# EAGLE board bat-phone Dodo (EAGLE 8.6.3)
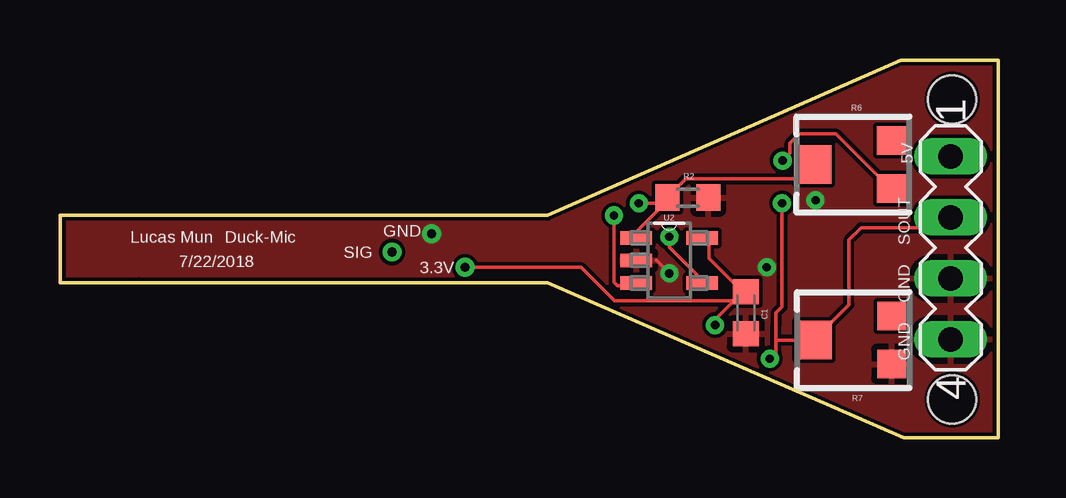
[diagram p0: board, top side]
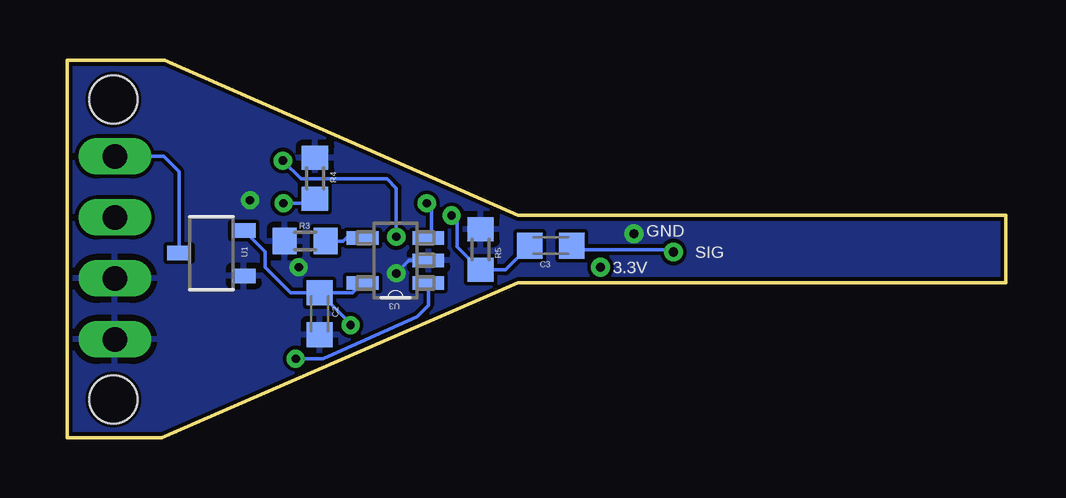
[diagram p1: board, bottom side, seen from below]

Size 39.12 x 15.75 mm. Coordinates in mm from the lower left corner, seen from the top.
Outline: 0,9.27 0,6.48 3.3,6.48 20.32,6.48 35.18,0 39.12,0 39.12,15.75 35.05,15.75 20.32,9.27 0,9.27
Copper layers (1*16): Top 0.035mm / dielectric 0.5mm / Bottom 0.035mm
Design rules "default *": minimum track width 6mil, minimum drill 0.35mm, track to track 6mil, track to pad 6mil, pad to pad 6mil, via to via 6mil, smd to smd 6mil, copper to edge 6mil, drill to drill 6mil, minimum pad ring 10mil, minimum via ring 8mil, stop-mask expansion 4mil, vias tented up to drill 0mil, thermal gap 10mil
Holes 2 mm at 37.2,1.6 37.2,14.1

## Footprints (pad centres in the part's own frame; a part is rotated, then mirrored left to right if it is on the bottom)
C0603K = smd 1.05 x 1.08: 1 -0.875,0; 2 0.875,0
R0603 = smd 1 x 1.1: 1 -0.85,0; 2 0.85,0
35WR = smd 1.2 x 1.2: 1 -1,-1.6; 3 1,-1.6 | smd 1.6 x 1.5: 2 0,1.65
MA04-1 = drill 1.016 long: 1 -3.81,0; 2 -1.27,0; 3 1.27,0; 4 3.81,0
SOT23A_MICROCHIP_CB = smd 0.6 x 1: 1 -0.95,-1.35; 2 0.95,-1.35; 3 0,1.35
SOT95P320X145-5N = smd 1.321 x 0.559: 1 -1.372,0.94; 2 -1.372,0; 3 -1.372,-0.94; 4 1.372,-0.94; 5 1.372,0.94

## Placement (x,y rotation side)
C1  [C0603K]  28.59,5.21 270 top
C2  [C0603K]  28.59,5.17 270 bottom
C3  638pF  [C0603K]  18.96,8.02 180 bottom
R2  [R0603]  26.17,10.02 180 top
R3  [R0603]  29.2,8.21 180 bottom
R4  [R0603]  28.79,10.82 270 bottom
R5  50K  [R0603]  21.89,7.85 270 bottom
R6  TC33X-2-103E  [35WR]  33.06,11.39 90 top
R7  TC33X-2-103E  [35WR]  33.07,4.08 90 top
SV1  [MA04-1]  37.13,7.92 270 top
U1  MCP1703-3302E/CB  [SOT23A_MICROCHIP_CB]  33.11,7.7 90 bottom
U2  MCP6291T-E/OT  [SOT95P320X145-5N]  25.39,7.4 0 top
U3  MCP6291T-E/OT  [SOT95P320X145-5N]  25.43,7.4 180 bottom

## Library data of the parts
C1-C3 R2-R5 = resistor
R6 R7 = TC33X-2-103E; AVAILABILITY: Unavailable; DESCRIPTION: Res Trimmer 10K Ohm 25% 0.1W_1/10W_ 1_Elec_/1_Mech_Turn _3 X 3.8mm_ Foot Print SMD Embossed T/R; MF: Bourns; MP: TC33X-2-103E; PACKAGE: FakePackage u; PRICE: None
SV1 = con-lstb; OC_FARNELL: unknown; OC_NEWARK: unknown
U1 = MCP1703
U2 U3 = MCP6291T-E_OT; AVAILABILITY: Good; DESCRIPTION: MCP6291 Series 6 V 10 MHz Rail-to-Rail I/O Operational Amplifier - SOT-23-5; MF: Microchip; MP: MCP6291T-E/OT; PACKAGE: SOT-23 Microchip; PRICE: 0.58 USD

## Nets
3.3V: C1.1 C2.1 U1.2 U2.5 U3.5
GND: C1.2 C2.2 R2.1 R3.2 R4.1 R5.1 R7.1 SV1.3 SV1.4 U1.1 U2.2 U3.2
N$1: R6.1 U2.4
N$2: R2.2 R6.2 U2.1 U3.3
N$3: R3.1 U3.4
N$4: C3.2 R5.2 U2.3
SIG: C3.1
SOUT: R4.2 R7.2 SV1.2 U3.1
VIN: SV1.1 U1.3

## Tracks (layer width: path | path; a pad name or v marks a point on that pad's centre or on a via)
3.3V  (via drill 0.35, 0.38)
  Top 0.152: U2.5 27.05,8.05 27.05,7.49 28.07,6.48 28.2,6.48 C1.1 28.59,6.21 | 28.59,6.21 27.3,4.93 v27.3,4.7 | v16.89,7.11 21.72,7.11 23.11,5.71 28.09,5.71 28.59,6.21
  Bottom 0.152: U1.2 30.86,7.75 30.86,7.11 29.8,6.05 C2.1 | C2.1 27.21,6.05 U3.5 | C2.1 27.3,4.76 v27.3,4.7
GND  (via drill 0.35, 0.38)
  Top 0.152: 24.86,7.4 v25.4,6.86
  Bottom 0.152: v25.4,6.86 24.86,7.4 U3.2
  other vias: 15.49,8.51 29.46,7.11 31.5,9.91
  pour Top: 40.51,16.26 40.51,-0.63 -1.14,-0.63 -1.14,16.26
  pour Bottom: -2.54,17.02 -2.54,-2.03 41.91,-2.03 41.91,17.02
N$1  (via drill 0.35)
  Top 0.152: v30.13,11.56 30.43,11.86 30.43,12.29 30.82,12.67 32.34,12.67 34.63,10.39 R6.1 | U2.4 26.77,6.59 25.4,7.95 v25.4,8.38
  Bottom 0.152: v25.4,8.38 25.4,10.41 25.78,10.79 29.37,10.79 v30.13,11.56
N$2  (via drill 0.35)
  Top 0.152: U2.1 24.02,8.59 25.32,9.89 R2.2 | R2.2 26.1,10.79 30.81,10.79 R6.2 | v24.13,9.78 25.09,9.78 R2.2
  Bottom 0.152: U3.3 23.93,8.47 23.93,9.58 v24.13,9.78
N$3
  Bottom 0.152: R3.1 27.61,8.21 27.43,8.38 27.05,8.38 27.01,8.34 U3.4
N$4  (via drill 0.35)
  Top 0.152: v23.09,9.27 23.09,6.5 23.18,6.41 23.24,6.35 23.91,6.35 U2.3
  Bottom 0.152: C3.2 20.85,7 R5.2 22.86,7.97 22.86,9.04 v23.09,9.27
SIG  (via drill 0.38)
  Bottom 0.152: C3.1 17.91,7.85 14.07,7.85 13.97,7.75 v13.84,7.75
SOUT  (via drill 0.35)
  Top 0.152: SV1.2 36.71,8.76 33.4,8.76 32.89,8.26 32.89,5.55 R7.2 31.41,4.06 29.84,4.06 | v30.1,9.78 30.1,5.46 29.84,5.21 29.84,4.7 29.84,4.06 | v29.59,3.3 29.84,3.56 29.84,4.06
  Bottom 0.152: R4.2 28.98,9.78 v30.1,9.78 | U3.1 24.06,5.53 24.54,5.05 28.46,3.3 v29.59,3.3
VIN
  Bottom 0.152: U1.3 34.46,11.09 35.1,11.73 SV1.1

## Text on the board
tPlace: 5V | SOUT | Lucas Mun | Duck-Mic | GND | 7/22/2018 | SIG | GND | 3.3V | GND
bPlace: GND | SIG | 3.3V